# EAGLE board antena_regulador (EAGLE 7.6.0)
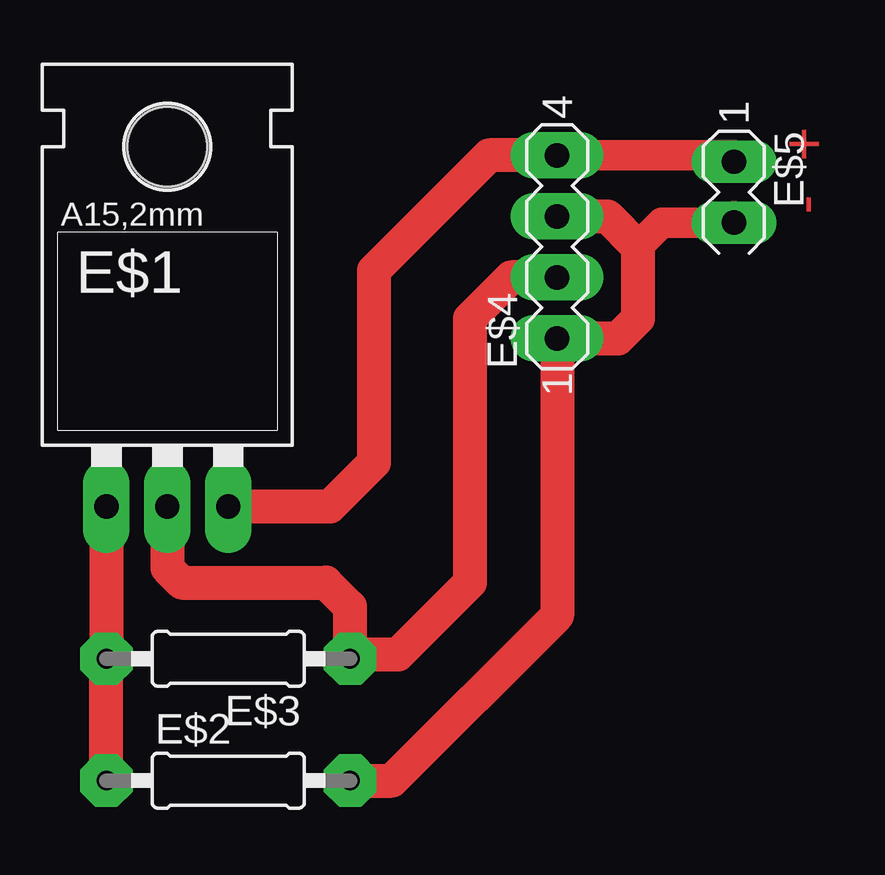
[diagram p0: board, top side]
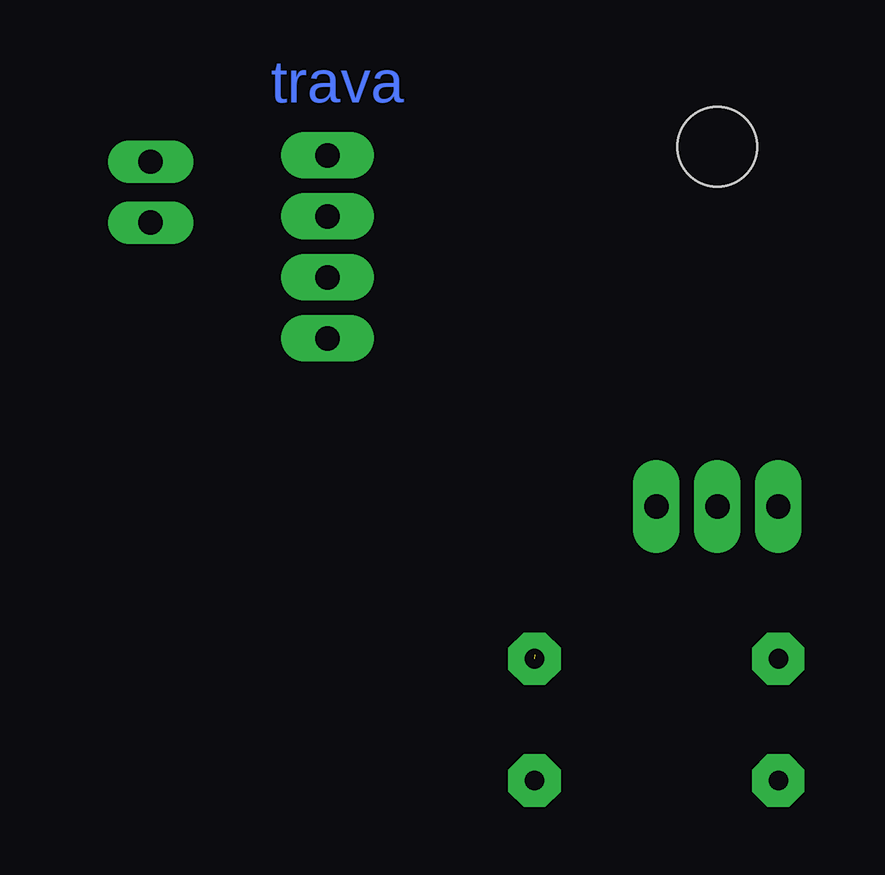
[diagram p1: board, bottom side, seen from below]

No outline drawn. Coordinates in mm, seen from the top.
Copper layers (1*16): Top 0.035mm / dielectric 1.5mm / Bottom 0.035mm
Design rules "default": minimum track width 10mil, minimum drill 24mil, track to track 8mil, track to pad 8mil, pad to pad 8mil, via to via 8mil, smd to smd 8mil, copper to edge 40mil, drill to drill 8mil, minimum pad ring 10mil, minimum via ring 8mil, stop-mask expansion 4mil, vias tented up to drill 0mil, thermal gap 10mil

## Footprints (pad centres in the part's own frame; a part is rotated, then mirrored left to right if it is on the bottom)
317TL = drill 1.016 pad 1.93 long: 1 -2.54,-3.81; 2 0,-3.81; 3 2.54,-3.81 | hole 3.302: 0,11.176
0207/10 = drill 0.813 pad 2.184 octagon: 1 -5.08,0; 2 5.08,0
MA04-1 = drill 1.016 pad 1.93 long: 1 -3.81,0; 2 -1.27,0; 3 1.27,0; 4 3.81,0
MA03-1 = drill 1.016 pad 1.778 long: 1 -2.54,0; 2 0,0

## Placement (x,y rotation side)
E$1  [317TL]  72.39,46.99 0 top
E$2  [0207/10]  74.93,31.75 0 top
E$3  [0207/10]  74.93,36.83 180 top
E$4  [MA04-1]  88.63,53.99 90 top
E$5  [MA03-1]  96,55 270 top

## Library data of the parts
E$1 = v-reg
E$2 E$3 = eagle-ltspice
E$4 E$5 = con-lstb

## Nets
S$1: E$1.1 E$2.1 E$3.2
S$2: E$1.2 E$3.1 E$4.2
S$3: E$2.2 E$4.1 E$4.3 E$5.2
S$4: E$1.3 E$4.4 E$5.1

## Tracks (layer width: path | path; a pad name or v marks a point on that pad's centre or on a via)
S$1
  Top 1.422: E$1.1 E$3.2 E$2.1
S$2  (1 unrouted)
  Top 1.422: E$1.2 72.39,40.61 73,40 79,40 80,39 80,37 | E$4.2 86.72,52.72 85,51 85,40 82,37 80.18,37 E$3.1
S$3
  Top 1.27: E$5.2 96,55.26 95.74,55 93,55 92,54
  Top 1.422: E$2.2 81.75,31.75 88.63,38.63 E$4.1 91.18,50.18 92,51 92,54 90.74,55.26 E$4.3
S$4
  Top 1.27: E$4.4 96,57.8 E$5.1
  Top 1.422: E$1.3 79.18,43.18 81,45 81,53 85.8,57.8 E$4.4

## Text on the board
Top: - +
Bottom: trava